# EAGLE board entity_module (EAGLE 6.3)
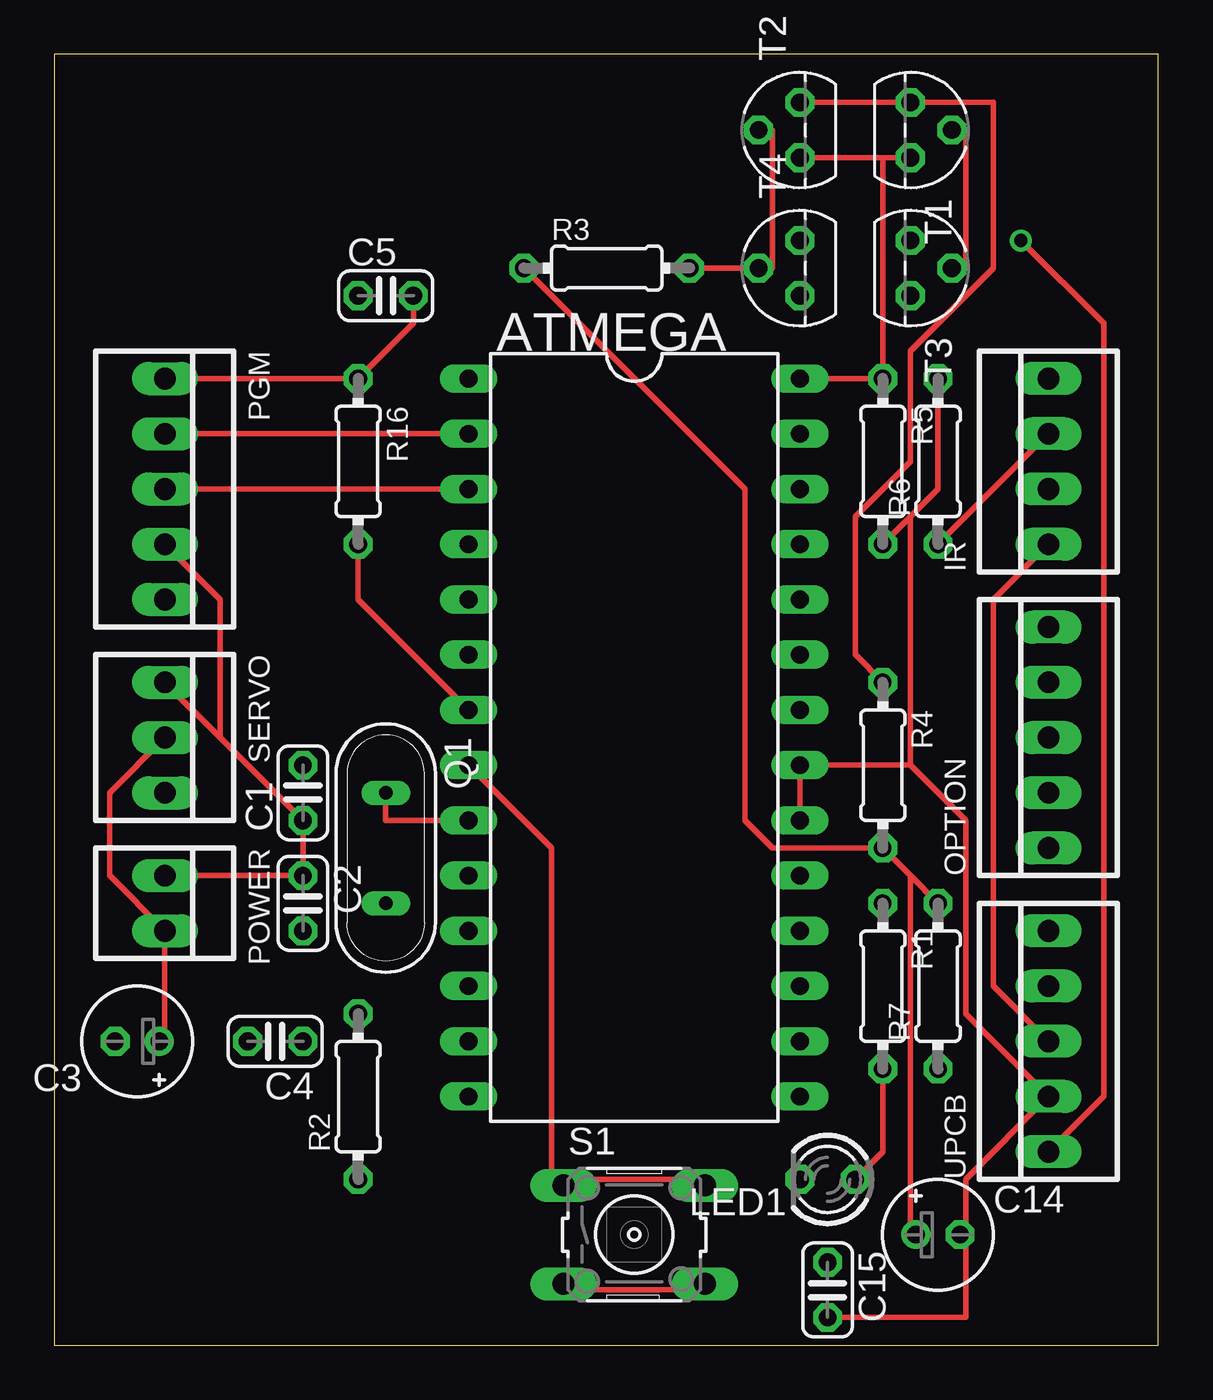
[diagram p0: board, top side]
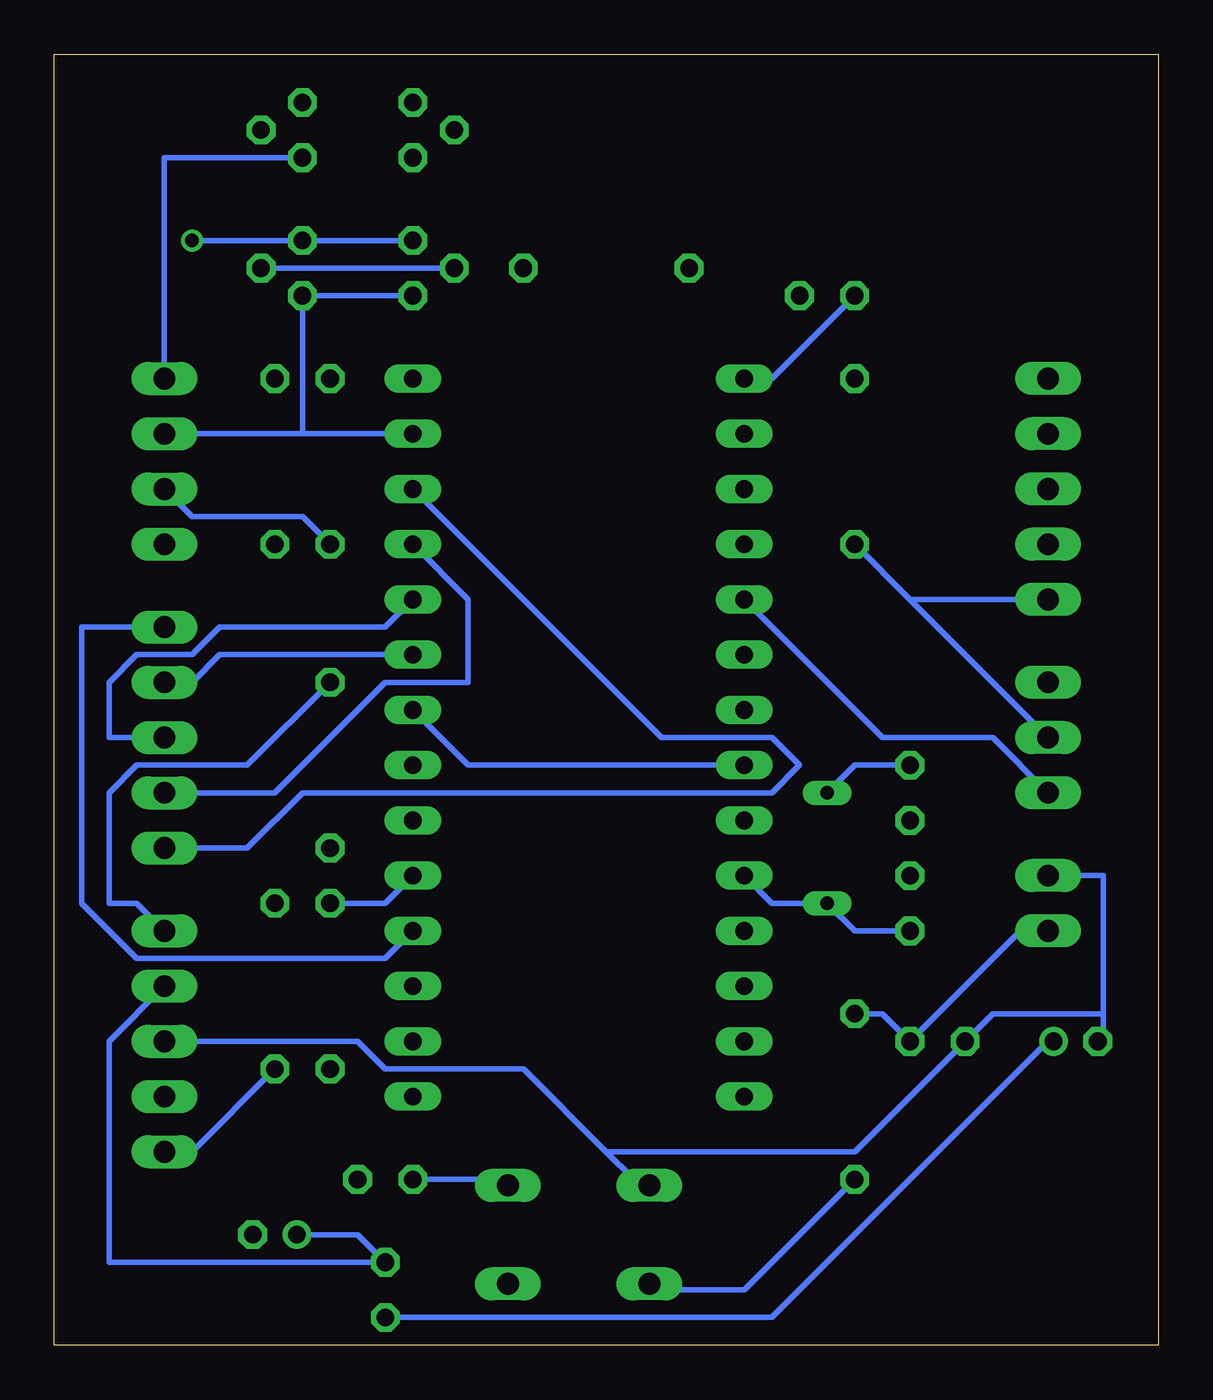
[diagram p1: board, bottom side, seen from below]

Size 50.78 x 59.36 mm. Coordinates in mm from the lower left corner, seen from the top.
Outline: 0,0 50.78,0 50.78,59.36 0,59.36 0,0
Copper layers (1*16): Top 0.035mm / dielectric 1.5mm / Bottom 0.035mm
Design rules "default": minimum track width 10mil, minimum drill 24mil, track to track 8mil, track to pad 8mil, pad to pad 8mil, via to via 8mil, smd to smd 8mil, copper to edge 40mil, drill to drill 8mil, minimum pad ring 10mil, minimum via ring 8mil, stop-mask expansion 4mil, vias tented up to drill 0mil, thermal gap 10mil

## Footprints (pad centres in the part's own frame; a part is rotated, then mirrored left to right if it is on the bottom)
DIL28-6 = drill 0.813 long: 1 -16.51,-7.62; 2 -13.97,-7.62; 3 -11.43,-7.62; 4 -8.89,-7.62; 5 -6.35,-7.62; 6 -3.81,-7.62; 7 -1.27,-7.62; 8 1.27,-7.62; 9 3.81,-7.62; 10 6.35,-7.62; 11 8.89,-7.62; 12 11.43,-7.62; 13 13.97,-7.62; 14 16.51,-7.62; 15 16.51,7.62; 16 13.97,7.62; 17 11.43,7.62; 18 8.89,7.62; 19 6.35,7.62; 20 3.81,7.62; 21 1.27,7.62; 22 -1.27,7.62; 23 -3.81,7.62; 24 -6.35,7.62; 25 -8.89,7.62; 26 -11.43,7.62; 27 -13.97,7.62; 28 -16.51,7.62
C025-024X044 = drill 0.813 octagon: 1 -1.27,0; 2 1.27,0
E2-5 = drill 0.813 pad 1.27: + -1.016,0 | drill 0.813 pad 1.27 octagon: - 1.016,0
22-23-2041 = drill 1 long: 1 -3.81,0; 2 -1.27,0; 3 1.27,0; 4 3.81,0
LED3MM = drill 0.813 octagon: A -1.27,0; K 1.27,0
22-23-2051 = drill 1 long: 1 -5.08,0; 2 -2.54,0; 3 0,0; 4 2.54,0; 5 5.08,0
22-23-2021 = drill 1 long: 1 -1.27,0; 2 1.27,0
QS = drill 0.61 long: 1 -2.54,0; 2 2.54,0
0204/7 = drill 0.813 octagon: 1 -3.81,0; 2 3.81,0
B3F-10XX = drill 1.016 long: 1 -3.251,2.261; 2 3.251,2.261; 3 -3.251,-2.261; 4 3.251,-2.261
22-23-2031 = drill 1 long: 1 -2.54,0; 2 0,0; 3 2.54,0
TO92-E1 = drill 0.813 octagon: 1 -1.27,0; 2 0,1.905; 3 1.27,0

## Placement (x,y rotation side)
ATMEGA  328  [DIL28-6]  26.67,27.94 270 top
C1  22PF  [C025-024X044]  11.43,25.4 90 top
C2  22PF  [C025-024X044]  11.43,20.32 270 top
C3  100uF  [E2-5]  3.81,13.97 180 top
C4  0.1uF  [C025-024X044]  10.16,13.97 180 top
C5  0.1uF  [C025-024X044]  15.24,48.26 0 top
C14  100uF  [E2-5]  40.64,5.08 0 top
C15  0.1uF  [C025-024X044]  35.56,2.54 270 top
IR  22-23-2041  [22-23-2041]  45.72,40.64 90 top
LED1  [LED3MM]  35.56,7.62 180 top
OPTION  22-23-2051  [22-23-2051]  45.72,27.94 90 top
PGM  22-23-2051  [22-23-2051]  5.08,39.37 270 top
POWER  22-23-2021  [22-23-2021]  5.08,20.32 270 top
Q1  16MHZ  [QS]  15.24,22.86 270 top
R1  220OHM  [0204/7]  38.1,16.51 270 top
R2  10KOHM  [0204/7]  13.97,11.43 90 top
R3  10KOHM  [0204/7]  25.4,49.53 0 top
R4  10KOHM  [0204/7]  38.1,26.67 270 top
R5  10KOHM  [0204/7]  38.1,40.64 270 top
R6  10KOHM  [0204/7]  40.64,40.64 90 top
R7  10KOHM  [0204/7]  40.64,16.51 90 top
R16  10KOHM  [0204/7]  13.97,40.64 270 top
S1  [B3F-10XX]  26.67,5.08 0 top
SERVO  22-23-2031  [22-23-2031]  5.08,27.94 270 top
T1  BJT  [TO92-E1]  39.37,55.88 270 top
T2  BJT  [TO92-E1]  34.29,55.88 90 top
T3  BJT  [TO92-E1]  39.37,49.53 270 top
T4  BJT  [TO92-E1]  34.29,49.53 90 top
UPCB  22-23-2051  [22-23-2051]  45.72,13.97 90 top

## Library data of the parts
ATMEGA = ic-package
C1-C5 C14 C15 R1-R7 R16 = rcl
IR = con-molex; MF: MOLEX; MPN: 22-23-2041; OC_FARNELL: 1462920; OC_NEWARK: 38C0355
LED1 = led
OPTION PGM UPCB = con-molex; MF: MOLEX; MPN: 22-23-2051; OC_FARNELL: 1462952; OC_NEWARK: 38C9178
POWER = con-molex; MF: MOLEX; MPN: 22-23-2021; OC_FARNELL: 1462926; OC_NEWARK: 25C3832
Q1 = special
S1 = switch-omron; MPN: B3F-1000; OC_FARNELL: 176432; OC_NEWARK: 36M3542
SERVO = con-molex; MF: MOLEX; MPN: 22-23-2031; OC_FARNELL: 1462950; OC_NEWARK: 30C0862
T1-T4 = transistor

## Nets
3V: C14.+ C15.1 R3.1 R4.2 R7.2 UPCB.4
5V: ATMEGA.7 ATMEGA.20 ATMEGA.21 C3.+ C4.1 C14.- C15.2 IR.2 PGM.5 POWER.2 R2.2 R5.2 R6.2 R16.2 SERVO.2 UPCB.2
CLK-1: ATMEGA.9 C1.2 Q1.1
CLK-2: ATMEGA.10 C2.2 Q1.2
GND: ATMEGA.8 ATMEGA.22 C1.1 C2.1 C3.- C4.2 IR.1 LED1.K PGM.4 POWER.1 S1.1 S1.2 SERVO.1 UPCB.3
I2C-EN: R3.2 T1.2 T2.2 T3.2 T4.2
LEDNET-1: ATMEGA.19 R1.1
LEDNET-2: LED1.A R1.2
N$1: ATMEGA.5 SERVO.3
OPTION1: ATMEGA.26 OPTION.1
OPTION2: ATMEGA.25 OPTION.2
OPTION3: ATMEGA.24 OPTION.3
OPTION4: ATMEGA.23 OPTION.4
OPTION5: ATMEGA.18 OPTION.5
OPTION6: ATMEGA.4
OPTION7: ATMEGA.6
OPTION8: ATMEGA.11
OPTION9: ATMEGA.12
OPTION10: ATMEGA.13
OPTION11: ATMEGA.14
OPTION12: ATMEGA.15
OPTION13: ATMEGA.16
OPTION14: ATMEGA.17
RST-1: C5.2 PGM.1 R16.1
RST-2: ATMEGA.1 C5.1
RST-SW: R2.1 S1.3 S1.4
RX-TX: ATMEGA.3 PGM.3
SCL: R4.1 T1.1 T2.3 UPCB.5
SCL-5V: ATMEGA.28 IR.4 R5.1 T1.3 T2.1
SDA: R7.1 T3.1 T4.3 UPCB.1
SDA-5V: ATMEGA.27 IR.3 R6.1 T3.3 T4.1
TX-RX: ATMEGA.2 PGM.2

## Tracks (layer width: path | path; a pad name or v marks a point on that pad's centre or on a via)
3V
  Top 0.254: R3.1 31.75,39.37 31.75,24.13 33.02,22.86 R4.2 39.37,21.59 | 39.37,21.59 R7.2 | 39.37,21.59 39.37,5.08 C14.+
  Bottom 0.254: C14.+ 36.83,5.08 C15.1 48.26,3.81 48.26,13.97 UPCB.4
5V
  Top 0.254: C3.+ 5.08,13.97 POWER.2 2.54,21.59 2.54,25.4 SERVO.2 | ATMEGA.7 13.97,34.29 R16.2 | C15.2 41.91,1.27 41.91,5.08 | 41.91,5.08 41.91,7.62 UPCB.2 41.91,15.24 41.91,24.13 39.37,26.67 | 41.91,5.08 C14.- | ATMEGA.20 ATMEGA.21 39.37,26.67 | 39.37,38.1 40.64,39.37 R6.2 | 39.37,38.1 R5.2 | 39.37,38.1 39.37,26.67
  Bottom 0.254: R2.2 12.7,15.24 C4.1 6.35,19.05 POWER.2 | 11.43,34.29 R16.2 | PGM.5 11.43,34.29 | 11.43,34.29 SERVO.2 | IR.2 44.45,38.1 39.37,38.1 R5.2 | C15.2 17.78,1.27 5.08,13.97 C3.+
CLK-1
  Top 0.254: ATMEGA.9 15.24,24.13 Q1.1
  Bottom 0.254: Q1.1 13.97,26.67 C1.2
CLK-2
  Bottom 0.254: C2.2 13.97,19.05 Q1.2 17.78,20.32 ATMEGA.10
GND
  Top 0.254: 7.62,27.94 C1.1 C2.1 POWER.1 | 7.62,27.94 SERVO.1 | PGM.4 7.62,34.29 7.62,27.94 | UPCB.3 43.18,16.51 43.18,34.29 IR.1 | ATMEGA.8 22.86,22.86 22.86,7.62 S1.1 24.13,7.62 29.21,7.62 S1.2
  Bottom 0.254: 2.54,15.24 2.54,21.59 POWER.1 | 2.54,15.24 2.54,13.97 C3.- | 2.54,15.24 7.62,15.24 C4.2 13.97,8.89 25.4,8.89 | LED1.K 30.48,7.62 S1.2 | ATMEGA.22 31.75,26.67 ATMEGA.8 | UPCB.3 36.83,13.97 35.56,12.7 29.21,12.7 25.4,8.89 | 25.4,8.89 24.13,7.62 S1.1
I2C-EN
  Top 0.254: T3.2 41.91,49.53 41.91,55.88 T1.2 | R3.2 T4.2 33.02,49.53 33.02,55.88 T2.2
  Bottom 0.254: T4.2 T3.2
LEDNET-1
  Bottom 0.254: ATMEGA.19 35.56,20.32 R1.1
LEDNET-2
  Top 0.254: LED1.A 38.1,8.89 R1.2
N$1
  Bottom 0.254: ATMEGA.5 12.7,27.94 7.62,27.94 SERVO.3
OPTION1
  Bottom 0.254: ATMEGA.26 22.86,27.94 17.78,27.94 16.51,26.67 17.78,25.4 39.37,25.4 41.91,22.86 OPTION.1
OPTION2
  Bottom 0.254: ATMEGA.25 31.75,34.29 31.75,30.48 35.56,30.48 40.64,25.4 OPTION.2
OPTION3
  Bottom 0.254: ATMEGA.24 35.56,33.02 43.18,33.02 44.45,31.75 46.99,31.75 48.26,30.48 48.26,27.94 OPTION.3
OPTION4
  Bottom 0.254: ATMEGA.23 43.18,31.75 44.45,30.48 OPTION.4
OPTION5
  Bottom 0.254: ATMEGA.18 35.56,17.78 46.99,17.78 49.53,20.32 49.53,33.02 OPTION.5
RST-1
  Top 0.254: C5.2 16.51,46.99 R16.1 PGM.1
RST-2
  Bottom 0.254: C5.1 17.78,44.45 ATMEGA.1
RST-SW
  Top 0.254: S1.4 29.21,2.54 24.13,2.54 S1.3
  Bottom 0.254: R2.1 19.05,2.54 22.86,2.54 S1.3
RX-TX
  Top 0.254: PGM.3 ATMEGA.3
SCL
  Top 0.254: T2.3 T1.1 43.18,57.15 43.18,49.53 39.37,45.72 39.37,40.64 36.83,38.1 36.83,31.75 R4.1
  Bottom 0.254: R4.1 41.91,26.67 46.99,26.67 48.26,25.4 48.26,20.32 46.99,20.32 UPCB.5
SCL-5V
  Top 0.254: ATMEGA.28 R5.1 38.1,54.61 | T1.3 38.1,54.61 | 38.1,54.61 T2.1
  Bottom 0.254: IR.4 45.72,54.61 T1.3
SDA  (via drill 0.61)
  Top 0.254: v44.45,50.8 48.26,46.99 48.26,11.43 UPCB.1
  Bottom 0.254: T4.3 T3.1 v44.45,50.8 | R7.1 44.45,8.89 UPCB.1
SDA-5V
  Top 0.254: IR.3 R6.1
  Bottom 0.254: T4.1 T3.3 39.37,41.91 | IR.3 39.37,41.91 | 39.37,41.91 ATMEGA.27
TX-RX
  Top 0.254: PGM.2 ATMEGA.2